# Altium PCB S6_BLE_TAG.PcbDoc
Units mm, origin at the board's own origin, x right, y up, seen from the top; angles counter-clockwise.
Board outline 30 x 26.3 mm, 2 copper layers (Top Layer, Bottom Layer); 33 components, 24 nets, 112 pads, 100 vias.
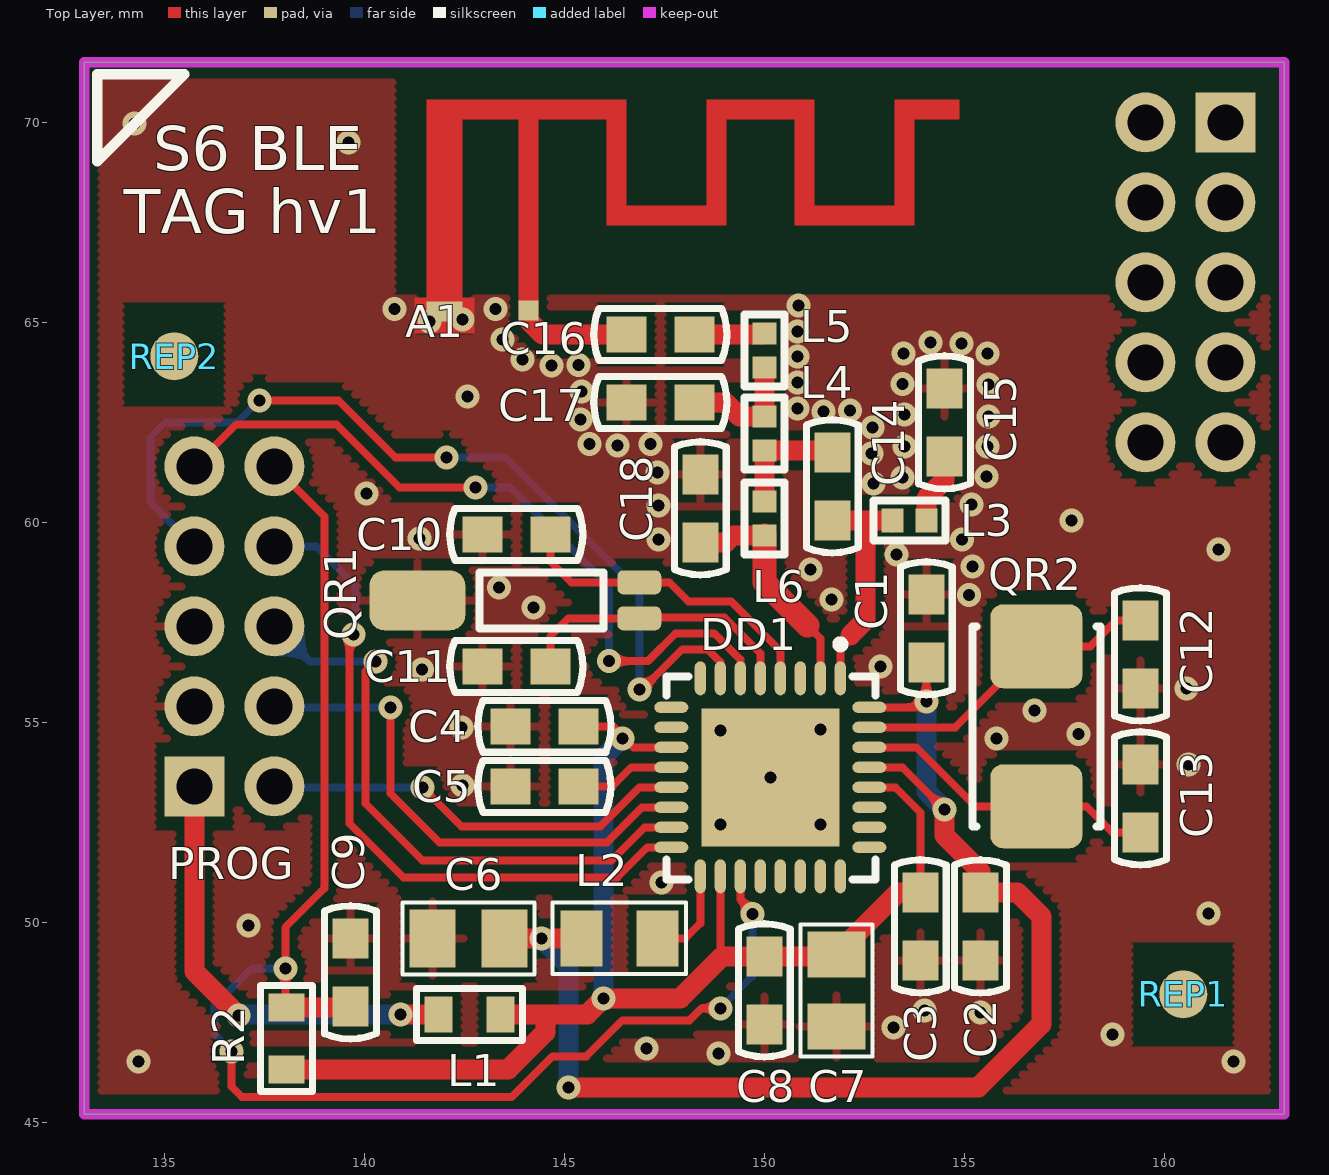
[diagram p0: Top Layer view]
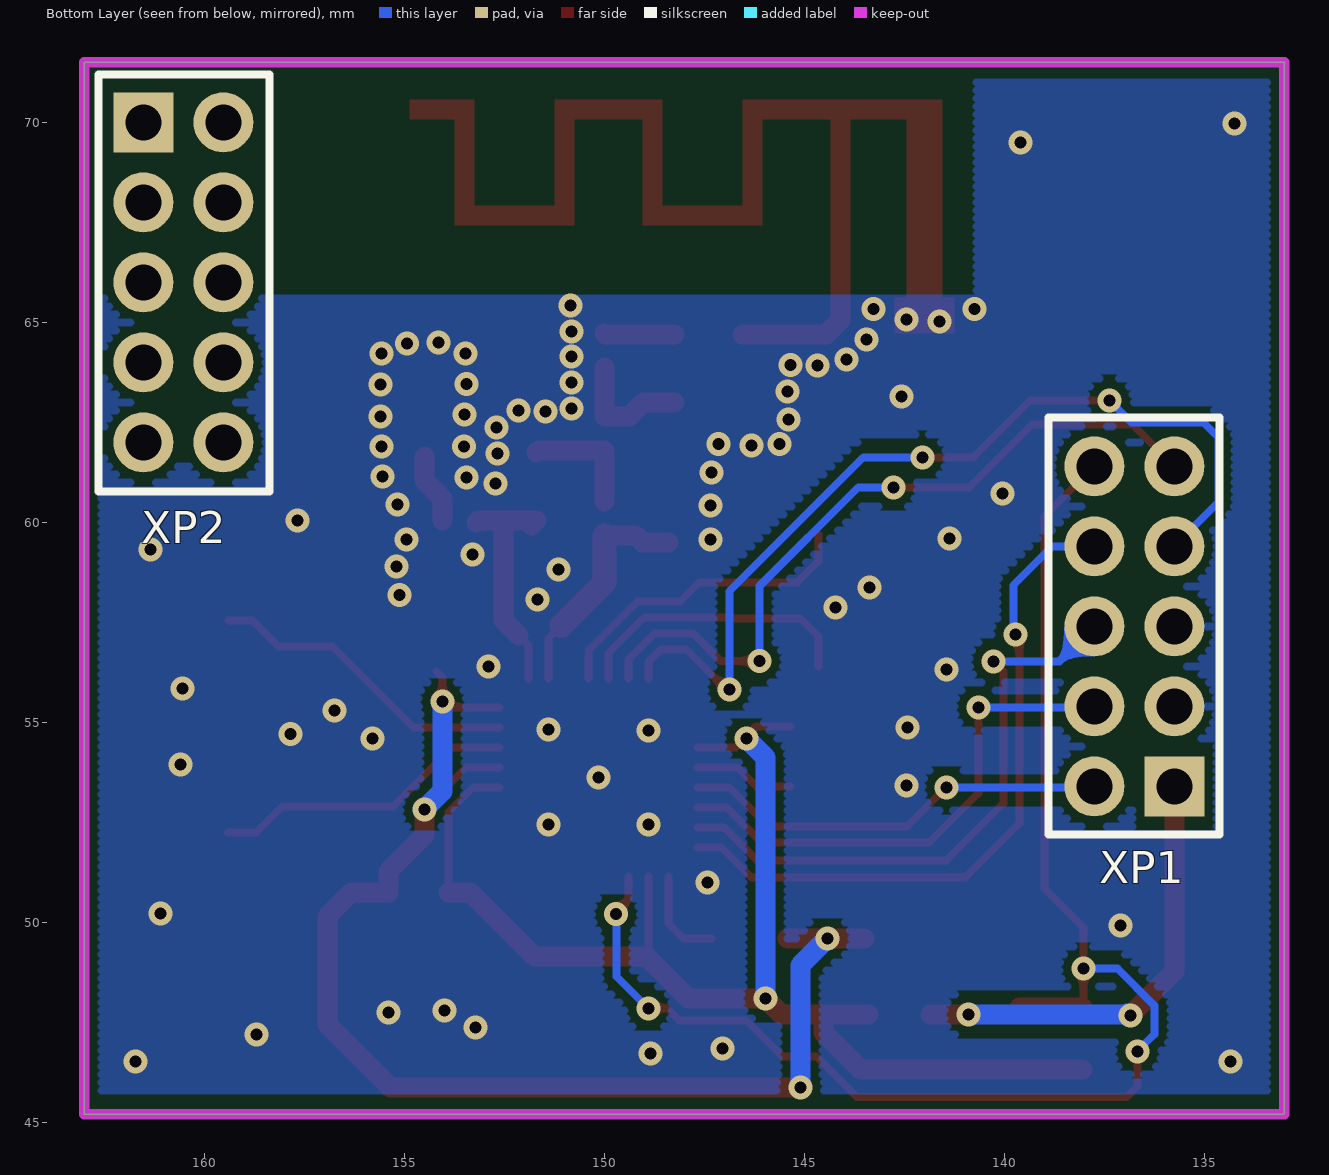
[diagram p1: Bottom Layer view, seen from below]
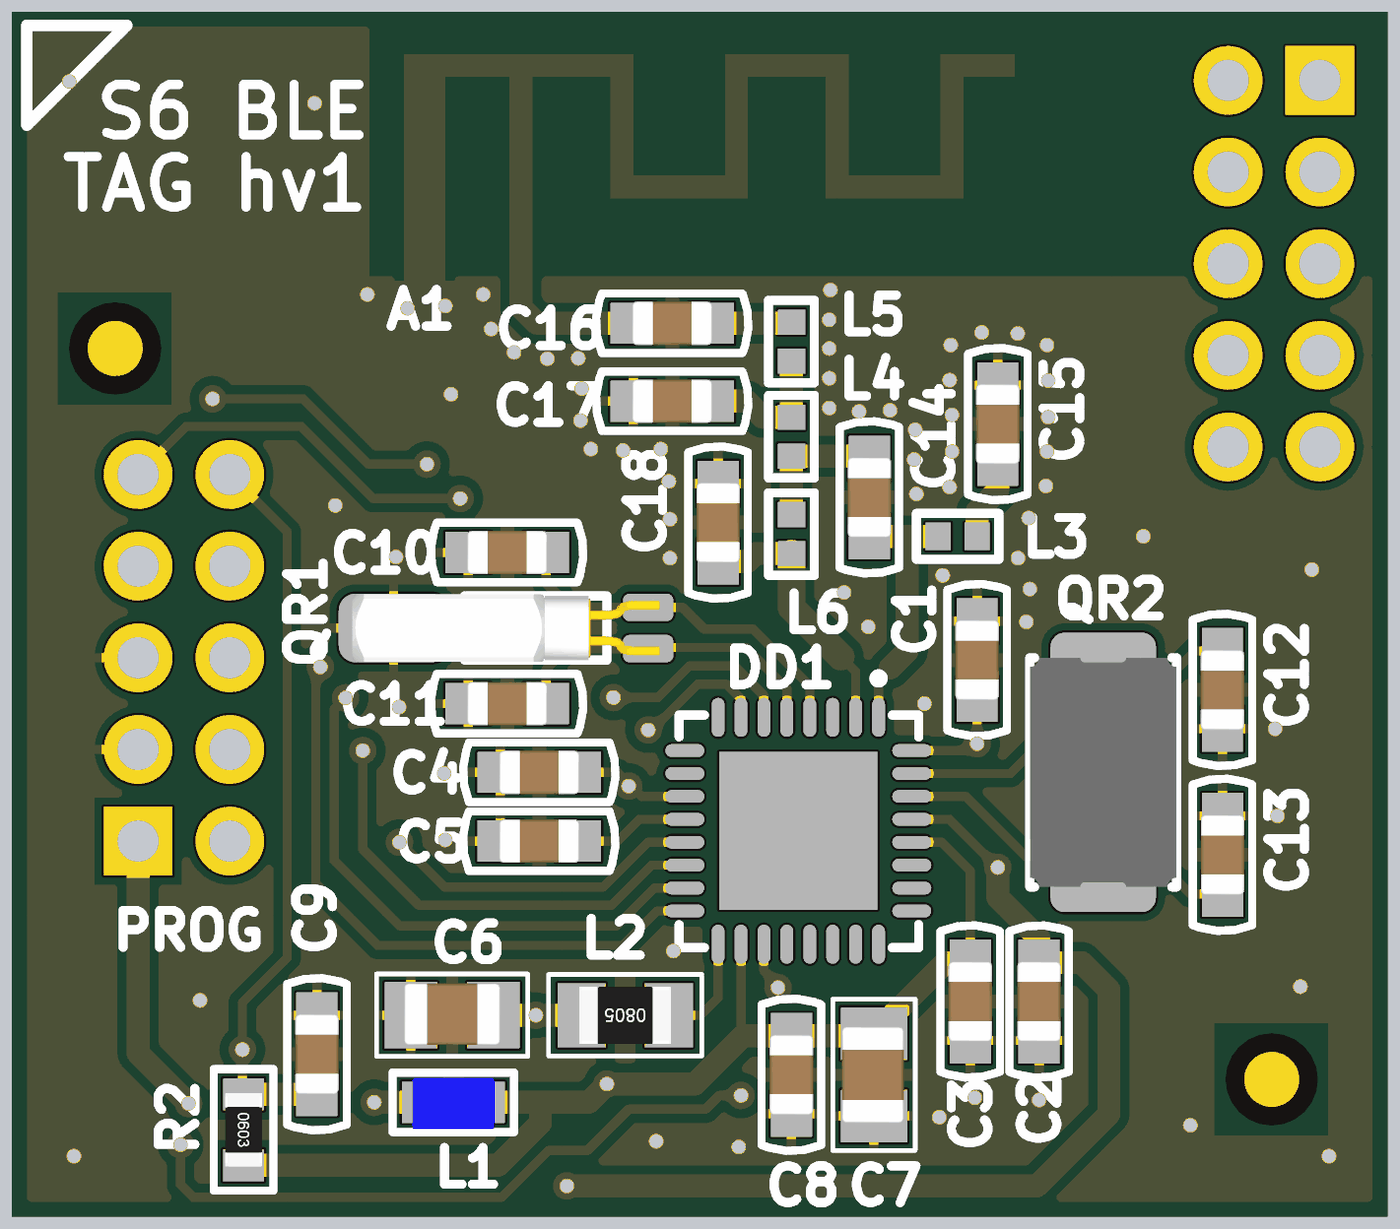
[diagram p2: 3D render of the assembled board from above, using the file's embedded part models]

## Layer stack, top to bottom
Top Solder: solder mask 0.0102, Solder Resist, Dk 3.5
Top Layer: signal copper 0.0356
Dielectric 1: dielectric 0.32, FR-4, Dk 4.8
Bottom Layer: signal copper 0.0356
Bottom Solder: solder mask 0.0102, Solder Resist, Dk 3.5

## Board outline
133,45.2 133,71.5 163,71.5 163,45.2

## Design rules (kind name [scope] priority, off if disabled: settings)
Clearance [All] p1: gap=0.2 ignorepadtopadclearanceinfootprint=FALSE
ComponentClearance [All] p1: gap=0.05 collisioncheckmode=3 verticalgap=2540 showdistances=FALSE
HoleSize [All] p1: absolutevalues=TRUE maxlimit=5 minlimit=0.025 maxpercent=80.000 minpercent=20.000
HoleToHoleClearance [All] p1: gap=0.05 allowstackedmicrovias=TRUE
MinimumSolderMaskSliver [All] p1: minsoldermaskwidth=0.05
PolygonConnect VIA [IsVia] p1: connectstyle=Direct reliefconductorwidth=0.254 reliefentries=4 polygonreliefangle="90 Angle" airgapwidth=0.254
PolygonConnect [All] p2: connectstyle=Relief reliefconductorwidth=0.2 reliefentries=4 polygonreliefangle="90 Angle" airgapwidth=0.2
RoutingVias [All] p1: holewidth=0.4 width=0.8 viastyle="Through Hole" minholewidth=0.3 minwidth=0.6 maxholewidth=0.5 maxwidth=1
ShortCircuit ShortCircuit_1 [InComponent('A1')] p1: allowed=TRUE
ShortCircuit [All] p2: allowed=FALSE
SilkToSilkClearance [All] p1: silktosilkclearance=0.05
SilkToSolderMaskClearance [IsPad] p1: minsilkscreentomaskgap=0.05 clearancetoexposedcopper=TRUE
SolderMaskExpansion [All] p1: expansion=0.102
Width [All] p1: maxlimit=1 minlimit=0.2 preferedwidth=0.5
23 further rules are at their usual default settings.

## Classes and differential pairs
component class [5]-CONNECTORS: XP1 XP2
component class [4]-RF: A1 C14 C15 C16 C17 C18 L3 L4 L5 L6
component class [3]-MCU: C1 C2 C3 C4 C5 C6 C7 C8 C9 C10 C11 C12 C13 DD1 L1 L2 QR1 QR2 R2 REP1 REP2

## Components (designator, comment, footprint, x,y, rotation, side; value= is the part's Value field where it differs from the comment)
A1 "Antenna Wi-Fi" Antenna_WiFi 144.1,65.3 r0 top
C1 "0.1uF" CC0603 154.05,57.35 r90 top
C2 "0.1uF" CC0603 155.4,49.9 r270 top
C3 "0.1uF" CC0603 153.9,49.9 r90 top
C4 "0.1uF" CC0603 144.5,54.9 r0 top
C5 "1uF" CC0603 144.5,53.4 r180 top
C6 "10uF" CC0805 142.6,49.6 r0 top
C7 "10uF" CC0805 151.8,48.3 r90 top
C8 "0.1uF" CC0603 150,48.3 r90 top
C9 "0.1uF" CC0603 139.65,48.75 r270 top
C10 "15pF" CC0603 143.8,59.7 r180 top
C11 "15pF" CC0603 143.8,56.4 r180 top
C12 "22pF" CC0603 159.4,56.7 r270 top
C13 "22pF" CC0603 159.402,53.1 r90 top
C14 "1pF" CC0603 151.7,60.9 r90 top
C15 "6.8pF" CC0603 154.5,62.5 r270 top
C16 "12pF" CC0603 147.4,64.7 r180 top
C17 "1pF" CC0603 147.4,63 r180 top
C18 "1pF" CC0603 148.4,60.35 r90 top
DD1 "CC2650" QFN32_TI 151.9,56.1 r270 top
L1 "BLM18HE152SN1" L0603 142.626,47.7 r0 top
L2 "10uH" RC0805 146.375,49.6 r180 top
L3 "2.4nH" L0402 153.625,60.05 r180 top
L4 "2nH" L0402 150,62.225 r90 top
L5 "2nH" L0402 150,64.3 r90 top
L6 "2.4nH" L0402 150,60.1 r90 top
QR1 "MS3V-T1R" MS3V-T1R 146.874,57.6 r180 top
QR2 "SJK-6L-24.0" AC5032_2 156.8,54.9 r270 top
R2 "100k" RC0603 138.05,47.1 r270 top
REP1 "REPER_POINT_1.2" REPER1.2 160.475,48.2 r0 top
REP2 "REPER_POINT_1.2" REPER1.2 135.25,64.15 r0 top
XP1 "PLD2-10" PLD2-10 135.775,53.4 r0 bottom locked
XP2 "PLD2-10" PLD2-10 161.5,70 r180 bottom locked

## Footprints (in the part's own frame and the unit in brackets; to place one, negate y for a bottom-side part, rotate by r counter-clockwise, add the part's x,y. Pads: shape width x height; smd on the part's side, far side on the other; paste and mask are expansions set on the pad)
AC5032_2 [mm]
  rrect30% 2.1x2.3 smd mask+0.05: 1(-2,0) 2(2,0)
  silkscreen extent -2.5,-1.6 2.5,1.6, body extent -2.5,-1.6 2.5,1.6, height 1.2
Antenna_WiFi [mm] "2.43Ghz 2.5dBi"
  rect 0.5x0.5 smd paste-10 mask+0.05: 1(0,0)
  rect 0.9x0.5 smd paste-10 mask+0.05: 2(-2.1,-0.025)
  Top Layer region: -2.55,0.1 -1.65,0.1 -1.65,4.9 -2.55,4.9
  Top Layer region: -2.55,4.775 2.45,4.775 2.45,5.275 -2.55,5.275
  Top Layer region: -0.25,-0.2 0.25,-0.2 0.25,4.9 -0.25,4.9
  Top Layer region: 1.95,2.125 2.45,2.125 2.45,4.9 1.95,4.9
  Top Layer region: 2.3,2.125 4.6,2.125 4.6,2.625 2.3,2.625
  Top Layer region: 4.45,2.125 4.95,2.125 4.95,4.9 4.45,4.9
  Top Layer region: 4.45,4.775 7.15,4.775 7.15,5.275 4.45,5.275
  Top Layer region: 6.65,2.125 7.15,2.125 7.15,5 6.65,5
  Top Layer region: 6.9,2.125 9.4,2.125 9.4,2.625 6.9,2.625
  Top Layer region: 9.15,2.125 9.65,2.125 9.65,4.9 9.15,4.9
  Top Layer region: 9.15,4.775 10.775,4.775 10.775,5.275 9.15,5.275
CC0603 [mm]
  rect 1x0.9 smd paste-25.4 mask+0.05: 1(-0.85,0) 2(0.85,0)
  silkscreen extent -1.66,-0.65 1.66,0.65, body extent -0.87,-0.47 0.88,0.48, height 0.85
CC0805 [mm]
  rect 1.15x1.45 smd paste-25.4 mask+0.05: 1(-0.9,0) 2(0.9,0)
  silkscreen extent -1.65,-0.9 1.65,0.9, body extent -1.05,-0.65 1.05,0.7, height 1.1
L0402 [mm]
  rect 0.55x0.6 smd mask+0.05: 1(-0.425,0) 2(0.425,0)
  silkscreen extent -0.9,-0.5 0.9,0.5
L0603 [mm]
  rect 0.7x0.9 smd paste-25.4 mask+0.05: 1(-0.775,0) 2(0.774,0)
  silkscreen extent -1.32,-0.65 1.33,0.65, body extent -0.9,-0.58 0.9,0.54, height 1
MS3V-T1R [mm]
  rrect50% 1.1x0.6 smd mask+0.05: 1(0,0) 2(0,-0.9)
  rrect50% 2.4x1.5 smd mask+0.05: 3(5.55,-0.45)
  silkscreen extent 0.9,-1.15 4,0.25, body extent -0.25,-1.19 6.45,0.29, height 1.48
PLD2-10 [mm]
  rect 1.5x1.5 hole 0.9 mask+0.05: 1(-0.025,0)
  round 1.5 hole 0.9 mask+0.05: 2(1.975,0) 3(-0.025,-2) 4(1.975,-2) 5(-0.025,-4) 6(1.975,-4) 7(-0.025,-6) 8(1.975,-6) 9(-0.025,-8) 10(1.975,-8)
  silkscreen extent -1.15,-9.23 3.13,1.2
QFN32_TI [mm]
  oval 0.85x0.28 smd mask+0.05: 1(0,0) 2(0,-0.5) 3(0,-1) 4(0,-1.5) 5(0,-2) 6(0,-2.5) 7(0,-3) 8(0,-3.5) 17(4.95,-3.5) 18(4.95,-3) 19(4.95,-2.5) 20(4.95,-2) 21(4.95,-1.5) 22(4.95,-1) 23(4.95,-0.5) 24(4.95,0)
  oval 0.28x0.85 smd mask+0.05: 9(0.725,-4.225) 10(1.225,-4.225) 11(1.725,-4.225) 12(2.225,-4.225) 13(2.725,-4.225) 14(3.225,-4.225) 15(3.725,-4.225) 16(4.225,-4.225) 25(4.225,0.725) 26(3.725,0.725) 27(3.225,0.725) 28(2.725,0.725) 29(2.225,0.725) 30(1.725,0.725) 31(1.225,0.725) 32(0.725,0.725)
  rect 3.45x3.45 smd mask+0.05: 33(2.475,-1.75)
  silkscreen extent -0.95,-4.35 5.02,0.87
RC0603 [mm]
  rect 0.7x0.9 smd paste-25.4 mask+0.05: 1(-0.775,0) 2(0.774,0)
  silkscreen extent -1.32,-0.65 1.33,0.65, body extent -0.8,-0.4 0.8,0.4, height 0.45
RC0805 [mm]
  rect 1.05x1.4 smd paste-25.4 mask+0.05: 1(-0.95,0) 2(0.95,0)
  silkscreen extent -1.67,-0.89 1.67,0.89, body extent -1,-0.62 1,0.63, height 0.6
REPER1.2 [mm]
  round 1.2 smd paste-25.4 mask+0.05: 1(0,0)
  Top Layer pour cut-out: -1.35,-1.325 1.325,-1.325 1.325,1.325 -1.35,1.325

## Part data
A1: "2.43GHz"
C1 C2 C3 C4 C5 C8 C9 C10 C11 C12 C13 C14 C15 C16 C17 C18: library part CC0603, "CC0603"
C6 C7: library part CC0805, "CC0805"
DD1: library part CC2650RHB, "CC2650RHBT"
L1: library part L0603, "L0603"
L2: library part L0805, "L0805"
L3 L4 L5 L6: library part L0402, "L0402"
QR1: "CRYSTAL_32768 Hz"
QR2: library part AC5032_2, "AC5032/2"
R2: library part RC0603, "RC0603"
REP1 REP2: library part REPER1.2, "REPER1.2"

## Via types
v1: diameter 0.6, hole 0.3, Top Layer to Bottom Layer, tented both sides, 100 vias

## Nets (pads, with @x,y where several pads share a name; then routed paths per layer and width w, separated by ;. In a path a pad name is that pad's centre, name@x,y a point inside that pad or via, vN(x,y) a via of type N, cw(c..) or ccw(c..) an arc to the next point about the centre after c; other vN are vias at no path point)
+3V: L1.1 XP1.1 | length 11.2
  Top Layer w0.5: XP1.1 135.75,48.775 v1(136.85,47.675) ; v1(140.9,47.7) L1.1
  Bottom Layer w0.5: v1(136.85,47.675) 136.9,47.675 136.95,47.725 136.975,47.7 v1(140.9,47.7)
+3V_F: C3.2 C4.2 C7.2 C8.2 DD1.11 DD1.18 DD1.28 L1.2 R2.2 | length 33.9
  Top Layer w0.2: C4.2 146.2,54.9 146.725,54.375 DD1.11 ; DD1.18 148.9,49.2 148.95,49.15 ; DD1.28 153.275,53.375 153.9,52.75 C3.2
  Top Layer w0.5: R2.2 143.601,46.326 144.525,47.25 144.525,47.675 144.55,47.7 ; L1.2 144.55,47.7 ; C3.2 153.35,50.75 C7.2 151.75,49.15 C8.2 148.95,49.15 147.9,48.1 v1(145.975,48.1) 145.575,47.7 144.55,47.7
  Bottom Layer w0.5: v1(145.975,48.1) 145.975,54.125 v1(146.45,54.6)
BT_RX: DD1.7 XP1.7 | length 23.2
  Top Layer w0.2: v1(137.375,63.05) 139.35,63.05 140.775,61.625 v1(142.05,61.625) ; v1@146.925,55.8 147.95,56.825 148.582,56.825 148.9,56.507 DD1.7
  Bottom Layer w0.2: XP1.7 134.65,60.5 134.65,62.125 135.025,62.5 136.825,62.5 v1(137.375,63.05) ; v1(142.05,61.625) 143.525,61.625 146.875,58.275 v1(146.875,55.825)
BT_TX: DD1.6 XP1.9 | length 18.7
  Top Layer w0.2: XP1.9 136.8,62.45 139.3,62.45 140.875,60.875 v1(142.775,60.875) ; v1(146.117,56.533) 147.092,56.533 147.784,57.225 148.748,57.225 149.4,56.573 DD1.6
  Bottom Layer w0.2: v1(142.775,60.875) 143.65,60.875 146.117,58.408 v1(146.117,56.533)
GND: A1.2 C1.2 C2.2 C3.1 C4.1 C5.2 C6.1 C7.1 C8.1 C9.1 C10.2 C11.2 C12.2 C13.2 C15.1 C17.2 C18.2 DD1.33 QR1.3 XP1.3 XP1.5
  other v1: 134.35,46.525 161.725,46.525 148.85,46.725 147.05,46.85 158.7,47.2 153.225,47.375 155.4,47.75 154,47.8 137.1,49.925 161.1,50.225 147.425,51 148.9,52.45 151.4,52.45 142.45,53.425 150.15,53.625 160.6,53.95 155.8,54.6 157.85,54.704 148.9,54.8 151.4,54.825 142.425,54.875 156.75,55.3 160.55,55.85 141.441,56.325 152.9,56.4 144.225,57.875 151.674,58.075 155.122,58.183 143.37,58.375 151.149,58.825 155.2,58.9 153.3,59.2 161.35,59.325 147.35,59.575 154.941,59.575 141.375,59.6 157.675,60.05 147.35,60.425 155.175,60.45 140.05,60.725 152.725,60.975 153.45,61.125 155.55,61.15 147.325,61.25 152.675,61.725 153.502,61.9 155.575,61.9 146.325,61.925 145.625,61.954 147.15,61.954 152.7,62.375 145.4,62.575 155.6,62.65 153.5,62.7 151.475,62.775 152.148,62.8 150.825,62.85 142.575,63.15 145.425,63.275 153.45,63.458 155.6,63.45 150.825,63.5 144.675,63.925 145.35,63.935 143.95,64.065 150.825,64.15 153.475,64.225 155.575,64.225 154.934,64.475 154.15,64.5 143.45,64.575 150.825,64.775 141.625,65.025 142.45,65.075 140.75,65.328 143.275,65.328 150.85,65.425 139.6,69.5 134.25,69.975
JTAG_TCK: DD1.14 XP1.4 | length 13
  Top Layer w0.2: v1(140.65,55.375) 140.65,53.225 141.875,52 146.069,52 146.944,52.875 DD1.14
  Bottom Layer w0.2: XP1.4 137.775,55.375 v1(140.65,55.375)
JTAG_TDI: DD1.16 XP1.8 | length 17.5
  Top Layer w0.2: v1(139.725,57.2) 139.625,57.1 139.625,52.475 140.975,51.125 146.325,51.125 147.075,51.875 DD1.16
  Bottom Layer w0.2: XP1.8 138.8,59.4 139.775,58.425 v1@139.775,57.15 ; v1(139.725,57.2) v1@139.775,57.15 ; v1@139.775,57.125 v1@139.775,57.15
JTAG_TDO: DD1.15 XP1.6 | length 15.1
  Top Layer w0.2: v1(140.275,56.525) 140.025,56.275 140.025,52.975 141.45,51.55 146.184,51.55 147.009,52.375 DD1.15
  Bottom Layer w0.2: XP1.6 138.625,56.525 v1(140.275,56.525)
JTAG_TMS: DD1.13 XP1.2 | length 10.7
  Top Layer w0.2: v1(141.45,53.375) 142.425,52.4 145.903,52.4 146.878,53.375 DD1.13
  Bottom Layer w0.2: XP1.2 137.775,53.375 v1(141.45,53.375)
NetA1_1: A1.1 C16.2 | length 2.8
  Top Layer w0.5: A1.1 144.1,65.05 144.45,64.7 C16.2
NetC1_1: C1.1 C2.1 C6.2 DD1.29 DD1.32 L2.2 | length 32.8
  Top Layer w0.2: DD1.29 153.45,53.875 v1(154.5,52.825) ; DD1.32 153.9,55.375 v1(154.05,55.525) 154.05,56.125 C1.1@154.2,56.275
  Top Layer w0.5: C6.2 v1(144.425,49.6) L2.2 ; v1(145.1,45.875) 155.35,45.875 156.925,47.45 156.925,50.15 156.325,50.75 C2.1 155.4,51.275 154.5,52.175 v1(154.5,52.825)
  Bottom Layer w0.5: v1(144.425,49.6) 145.1,48.925 v1(145.1,45.875) ; v1(154.05,55.525) 154.05,53.275 v1(154.5,52.825)
NetC5_1: C5.1 DD1.12 | length 2.5
  Top Layer w0.2: C5.1 146.2,53.4 146.675,53.875 DD1.12
NetC12_1: C12.1 DD1.31 QR2.1 | length 7.9
  Top Layer w0.2: DD1.31 154.775,54.875 QR2.1 158.15,56.9 158.8,57.55 C12.1
NetC13_1: C13.1 DD1.30 QR2.2 | length 7.7
  Top Layer w0.2: DD1.30 153.8,54.375 155.275,52.9 QR2.2 158.05,52.9 158.7,52.25 C13.1
NetC14_2: C14.2 L4.1 L6.2 | length 3
  Top Layer w0.5: L6.2 L4.1 151.65,61.8 C14.2
NetC15_2: C15.2 L3.1 | length 1.8
  Top Layer w0.5: L3.1 154.05,60.6 154.5,61.05 C15.2
NetC16_1: C16.1 L5.2 | length 1.8
  Top Layer w0.5: C16.1 149.975,64.7 L5.2
NetC17_1: C17.1 L4.2 L5.1 | length 3.1
  Top Layer w0.5: C17.1 149.025,63 149.375,62.65 L4.2 L5.1
NetDD1_17: DD1.17 L2.1 | length 2.4
  Top Layer w0.2: L2.1 148.025,49.6 148.4,49.975 DD1.17
RESET: C9.2 DD1.19 R2.1 XP1.10 | length 37.5
  Top Layer w0.2: v1(136.675,46.775) 136.675,45.9 136.948,45.627 143.68,45.627 144.703,46.65 145.55,46.65 146.45,47.55 148.128,47.55 148.428,47.85 v1(148.9,47.85) ; XP1.10 139,60.15 139,50.85 138.025,49.875 v1(138.025,48.85) 138.025,47.9 R2.1 ; C9.2@139.625,47.875 C9.2 ; DD1.19 149.4,50.575 149.707,50.268 v1(149.707,50.202)
  Top Layer w0.5: R2.1 C9.2@139.625,47.875
  Bottom Layer w0.2: v1(136.675,46.775) 136.25,47.2 136.25,47.924 137.176,48.85 v1(138.025,48.85) ; v1(148.9,47.85) 149.7,48.65 149.7,50.21 v1(149.707,50.202)
RF_N: C18.1 DD1.2 L6.1 | length 5.8
  Top Layer w0.2: 151.075,57.425 151.4,57.1 DD1.2
  Top Layer w0.5: C18.1 149.04,59.5 149.215,59.675 L6.1
  Top Layer w0.6: L6.1 150,58.5 151.075,57.425
RF_P: C14.1 DD1.1 L3.2 | length 5.9
  Top Layer w0.2: DD1.1 151.9,56.925 152.15,57.175
  Top Layer w0.5: C14.1@151.825,59.925 C14.1 152.525,60.05 ; 152.15,57.175 152.525,57.55 152.525,60.05 ; L3.2@153.2,60 153.15,60.05 152.525,60.05
X32K_Q1: C10.1 DD1.4 QR1.2 | length 8
  Top Layer w0.2: C10.1 144.65,59.025 145.175,58.5 QR1.2 147.625,58.5 148.1,58.025 149.165,58.025 150.4,56.79 DD1.4
X32K_Q2: C11.1 DD1.5 QR1.1 | length 7.2
  Top Layer w0.2: C11.1 144.65,57.15 145.1,57.6 QR1.1 146.899,57.625 148.999,57.625 149.9,56.724 DD1.5
pads on no net: DD1.3 DD1.8 DD1.9 DD1.10 DD1.20 DD1.21 DD1.22 DD1.23 DD1.24 DD1.25 DD1.26 DD1.27 REP1.1 REP2.1 XP2.1 XP2.2 XP2.3 XP2.4 XP2.5 XP2.6 XP2.7 XP2.8 XP2.9 XP2.10

## Polygon pours and split planes (outlines as drawn)
GND on Top Layer "GND_L01_P002" (hatched Horizontal grid 0.2 track 0.2, remove dead copper, pour order 2): 133,45.2 133,71.5 163,71.5 163,45.2
GND on Bottom Layer "GND_L02_P004" (hatched Horizontal grid 0.2 track 0.2, remove dead copper, pour order 4): 133,45.2 133,71.5 163,71.5 163,45.2

## Keep-outs
Keep-Out Layer:
  the board outline again, w0.254

## Other copper
Top Layer:
  rectangle net GND: 141.25,64.725 142.75,65.625
  pour cut-out: 140.7,71.5 140.7,65.625 163,65.625 163,71.5
Bottom Layer:
  pour cut-out: 140.7,71.5 140.7,65.625 163,65.625 163,71.5

## Silkscreen, mask and mechanical layers (free items; w line width, h text height)
Top Overlay:
  lines w0.254: 133.325,69.025 135.5,71.2 133.325,71.2 133.325,69.025
  text "S6 BLE" at 134.725,68.8 h1.1
  text "TAG hv1" at 133.992,67.225 h1.1
  text "PROG" at 135.1,51.075 h0.8